# EAGLE board Analog Function Generator (EAGLE 9.7.0)

Size 217.58 x 187.73 mm. Coordinates in mm from the lower left corner, seen from the top.
Outline: 0,0 217.58,0 217.58,187.73 0,187.73 0,0
Copper layers (1*16): Top 0.035mm / dielectric 1.5mm / Bottom 0.035mm
Design rules "default": minimum track width 6mil, minimum drill 0.35mm, track to track 6mil, track to pad 6mil, pad to pad 6mil, via to via 6mil, smd to smd 6mil, copper to edge 40mil, drill to drill 6mil, minimum pad ring 10mil, minimum via ring 8mil, stop-mask expansion 4mil, vias tented up to drill 0mil, thermal gap 10mil

## Footprints (pad centres in the part's own frame; a part is rotated, then mirrored left to right if it is on the bottom)
CAP-THRU-2.54MM = drill 1.016 pad 1.88: 1 -1.27,0; 2 1.27,0
BATTERY-GENERIC = drill 1.118 pad 3.15 octagon: + 2.54,0; - -2.54,0
RESAD1016W63L850D250B = drill 0.83 pad 1.43: 1 -5.08,0; 2 5.08,0
HA-06-SM065 = drill 1 pad 1.676: 1 -2.54,-2.54; 2 0,2.54; 3 2.54,-2.54
DIP826W53P254L959H508Q8B = drill 0.786 pad 1.386: 1 -4.13,3.81; 2 -4.13,1.27; 3 -4.13,-1.27; 4 -4.13,-3.81; 5 4.13,-3.81; 6 4.13,-1.27; 7 4.13,1.27; 8 4.13,3.81

## Placement (x,y rotation side)
C1  0.01u  [CAP-THRU-2.54MM]  105.74,83.96 0 top
C2  0.01u  [CAP-THRU-2.54MM]  105.82,24.11 0 top
C3  100n  [CAP-THRU-2.54MM]  67.72,13.95 0 top
C7  100n  [CAP-THRU-2.54MM]  131,152.24 0 top
CTIMING_CAPACITOR  1n  [CAP-THRU-2.54MM]  90.36,131.92 0 top
P1  BATTERYGENERIC  [BATTERY-GENERIC]  36.43,179.35 180 top
P2  BATTERYGENERIC  [BATTERY-GENERIC]  8.26,179.47 180 top
R1  470k  [RESAD1016W63L850D250B]  99.25,139.54 90 top
R2  10k  [RESAD1016W63L850D250B]  63.83,78.88 90 top
R3  10k  [RESAD1016W63L850D250B]  63.91,19.03 90 top
R4  100  [RESAD1016W63L850D250B]  99.47,29.19 0 top
R5  100  [RESAD1016W63L850D250B]  99.39,89.04 0 top
R6  10k  [RESAD1016W63L850D250B]  167.83,139.54 90 top
R7  10k  [RESAD1016W63L850D250B]  170.37,126.84 0 top
R8  10k  [RESAD1016W63L850D250B]  180.53,129.38 0 top
R9  1M  [RESAD1016W63L850D250B]  104.47,96.66 270 top
R10  1M  [RESAD1016W63L850D250B]  104.55,36.81 90 top
R11  20k  [RESAD1016W63L850D250B]  167.97,78.88 90 top
R12  10k  [RESAD1016W63L850D250B]  168.05,19.03 90 top
R13  10k  [RESAD1016W63L850D250B]  170.59,6.33 0 top
R14  10k  [RESAD1016W63L850D250B]  180.75,8.87 0 top
R15  20k  [RESAD1016W63L850D250B]  170.51,66.18 0 top
R16  20k  [RESAD1016W63L850D250B]  180.67,68.72 0 top
RPOT1  500k  [HA-06-SM065]  89.09,154.78 0 top
RPOT2  10k  [HA-06-SM065]  190.69,154.78 0 top
RPOT3  10k  [HA-06-SM065]  190.83,94.12 0 top
RPOT4  10k  [HA-06-SM065]  190.91,34.27 0 top
U1  OPAMP_DIP  [DIP826W53P254L959H508Q8B]  148.92,80.15 90 top
U2  OPAMP_DIP  [DIP826W53P254L959H508Q8B]  115.98,20.3 90 top
U3  LM555_DIP  [DIP826W53P254L959H508Q8B]  113.22,140.81 90 top
U4  OPAMP_DIP  [DIP826W53P254L959H508Q8B]  149,20.3 90 top
U5  OPAMP_DIP  [DIP826W53P254L959H508Q8B]  176.86,80.15 90 top
U6  OPAMP_DIP  [DIP826W53P254L959H508Q8B]  207.34,80.15 90 top
U7  OPAMP_DIP  [DIP826W53P254L959H508Q8B]  207.42,20.3 90 top
U8  OPAMP_DIP  [DIP826W53P254L959H508Q8B]  176.94,20.3 90 top
UBUFFER  OPAMP_DIP  [DIP826W53P254L959H508Q8B]  148.78,140.81 90 top
UBUFFER1  OPAMP_DIP  [DIP826W53P254L959H508Q8B]  207.2,140.81 90 top
USINE_WAVE_INTEGRATOR  OPAMP_DIP  [DIP826W53P254L959H508Q8B]  115.9,80.15 90 top
USUMMER  OPAMP_DIP  [DIP826W53P254L959H508Q8B]  176.72,140.81 90 top

## Library data of the parts
C1-C3 C7 CTIMING_CAPACITOR P1 P2 R1-R16 RPOT1-RPOT4 U1 U2 U4-U8 UBUFFER UBUFFER1 USINE_WAVE_INTEGRATOR USUMMER = Tinkercad
U3 = Tinkercad; CATEGORY: IC_Clock-Timing; CURRENT-SUPPLY: 10mA; DESCRIPTION: IC OSC SINGLE TIMER 100KHZ 8-DIP; FREQUENCY: 100kHz; MANUFACTURER: Texas Instruments; MPN: LM555CN/NOPB; OPERATING_TEMP: 0°C to 70°C; PART_STATUS: Active; ROHS_COMPLIANT: ROHS3 Compliant; SUB-CATEGORY: Timer

## Nets
P1+: P1.+ RPOT1.1 RPOT2.1 RPOT3.1 RPOT4.1 U1.7 U2.7 U3.4 U3.8 U4.7 U5.7 U6.7 U7.7 U8.7 UBUFFER1.7 UBUFFER.7 USINE_WAVE_INTEGRATOR.7 USUMMER.7
P2+: C7.2 CTIMING_CAPACITOR.1 P1.- P2.+ R9.1 R10.2 RPOT1.3 U2.3 U3.1 U5.3 U8.3 USINE_WAVE_INTEGRATOR.3 USUMMER.3
P2-: P2.- RPOT2.3 RPOT3.3 RPOT4.3 U1.4 U2.4 U4.4 U5.4 U6.4 U7.4 U8.4 UBUFFER1.4 UBUFFER.4 USINE_WAVE_INTEGRATOR.4 USUMMER.4
R3_1: C3.1 R3.1
R4_2: C2.1 R4.2
R5_2: C1.1 R5.2 R9.2
RPOT2_P$2: R8.2 RPOT2.2
RPOT3_P$2: R16.2 RPOT3.2
RPOT4_P$2: R14.2 RPOT4.2
U1_+IN: C1.2 U1.3 USINE_WAVE_INTEGRATOR.6
U1_OUT: R15.1 U1.2 U1.6
U2_-IN: C3.2 R4.1 U2.2
U3_CV: C7.1 U3.5
U3_DIS: R1.2 RPOT1.2 U3.7
U3_OUT: U3.3 UBUFFER.3
U3_THR: CTIMING_CAPACITOR.2 R1.1 U3.2 U3.6
U4_+IN: C2.2 U2.6 U4.3
U4_OUT: R13.1 U4.2 U4.6
U5_-IN: R11.1 R15.2 R16.1 U5.2
U5_OUT: R11.2 U5.6 U6.3
U6_OUT: R3.2 U6.2 U6.6
U7_OUT: U7.2 U7.6
U8_-IN: R12.1 R13.2 R14.1 U8.2
U8_OUT: R12.2 U7.3 U8.6
UBUFFER1_+IN: R6.2 UBUFFER1.3 USUMMER.6
UBUFFER1_OUT: R2.2 UBUFFER1.2 UBUFFER1.6
UBUFFER_-IN: R7.1 UBUFFER.2 UBUFFER.6
USINE_WAVE_INTEGRATOR_-IN: R2.1 R5.1 USINE_WAVE_INTEGRATOR.2
USUMMER_-IN: R6.1 R7.2 R8.1 USUMMER.2

## Tracks (layer width: path | path; a pad name or v marks a point on that pad's centre or on a via)
P1+  (17 unrouted)
P2+  (12 unrouted)
P2-  (14 unrouted)
R3_1  (1 unrouted)
R4_2  (1 unrouted)
R5_2  (2 unrouted)
RPOT2_P$2  (1 unrouted)
RPOT3_P$2  (1 unrouted)
RPOT4_P$2  (1 unrouted)
U1_+IN  (2 unrouted)
U1_OUT  (2 unrouted)
U2_-IN  (2 unrouted)
U3_CV  (1 unrouted)
U3_DIS  (2 unrouted)
U3_OUT  (1 unrouted)
U3_THR  (3 unrouted)
U4_+IN  (2 unrouted)
U4_OUT  (2 unrouted)
U5_-IN  (3 unrouted)
U5_OUT  (2 unrouted)
U6_OUT  (2 unrouted)
U7_OUT  (1 unrouted)
U8_-IN  (3 unrouted)
U8_OUT  (2 unrouted)
UBUFFER1_+IN  (2 unrouted)
UBUFFER1_OUT  (2 unrouted)
UBUFFER_-IN  (2 unrouted)
USINE_WAVE_INTEGRATOR_-IN  (2 unrouted)
USUMMER_-IN  (3 unrouted)